# Altium PCB Consola_ESP32_V2.PcbDoc
Units mil, origin at the board's own origin, x right, y up, seen from the top; angles counter-clockwise.
Board outline 1969.17 x 2600 mil, 4 copper layers (Top Layer, GND, VCC, Bottom Layer), stack 62.638 mil thick; 58 components, 92 nets, 300 pads, 182 vias.
Unrouted connection lines stored in the file: 2.
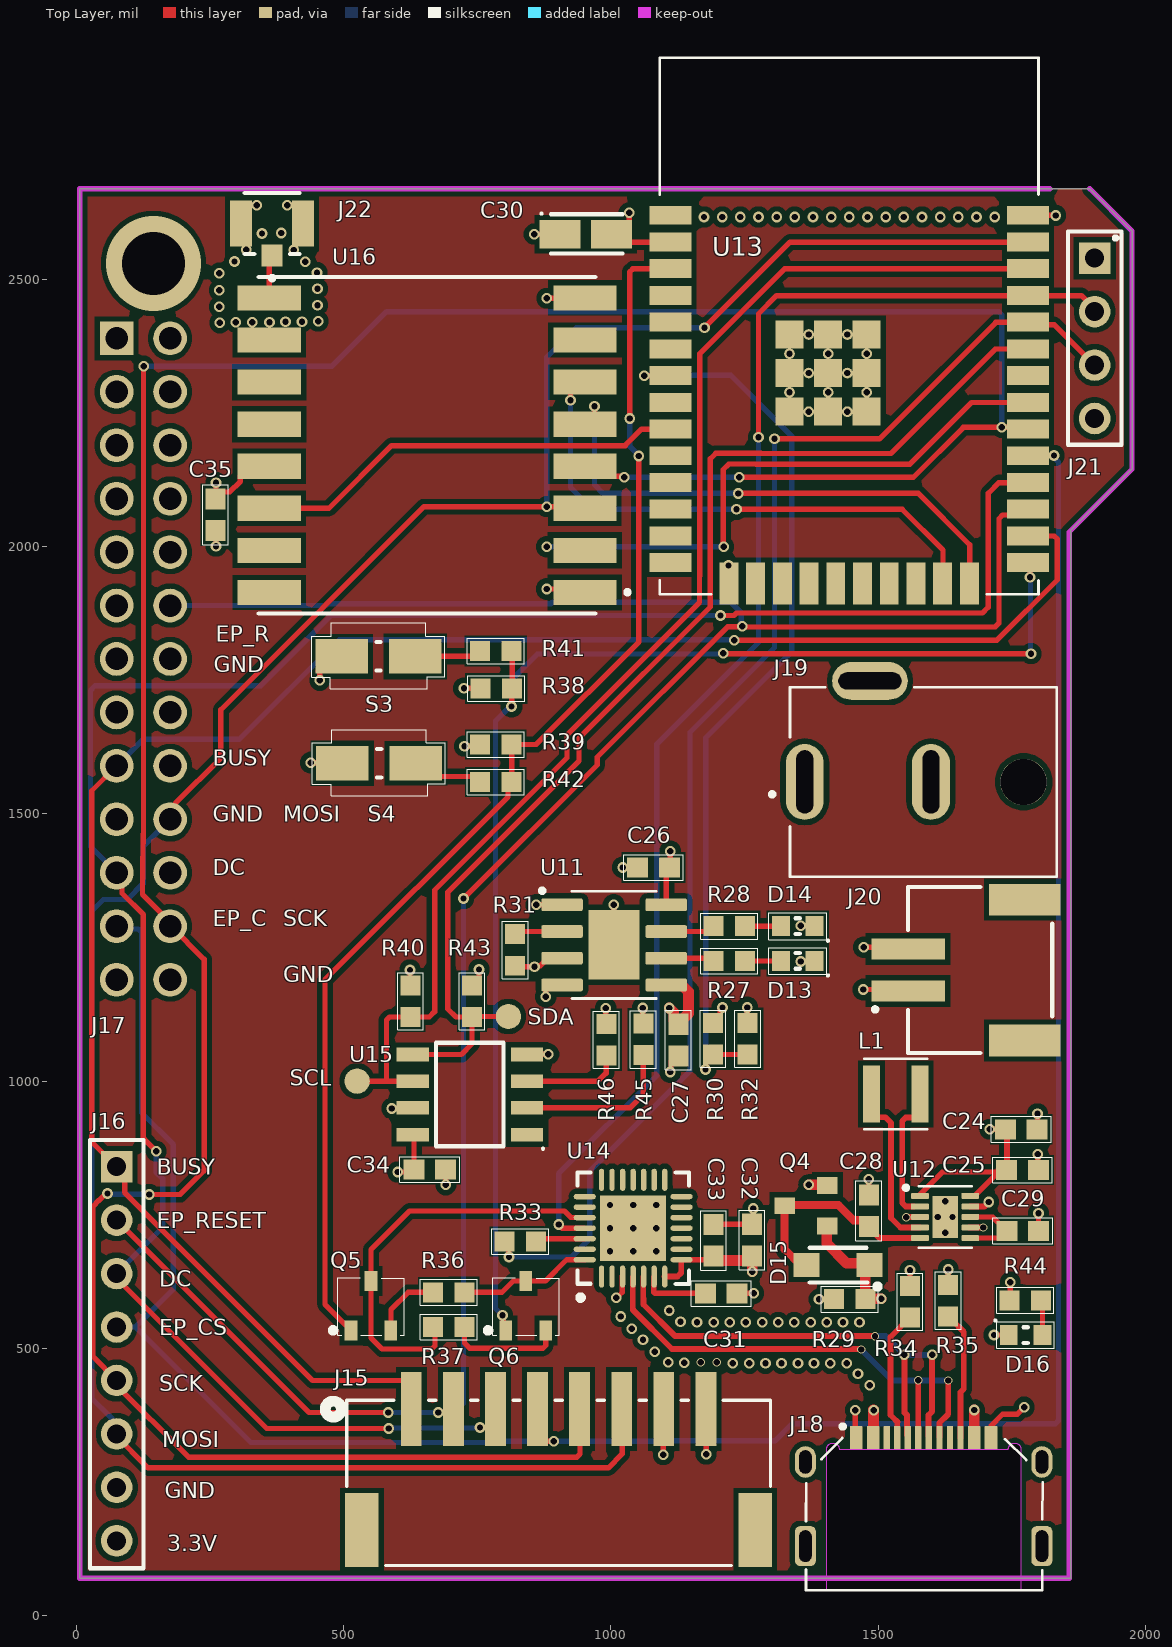
[diagram p0: Top Layer view]
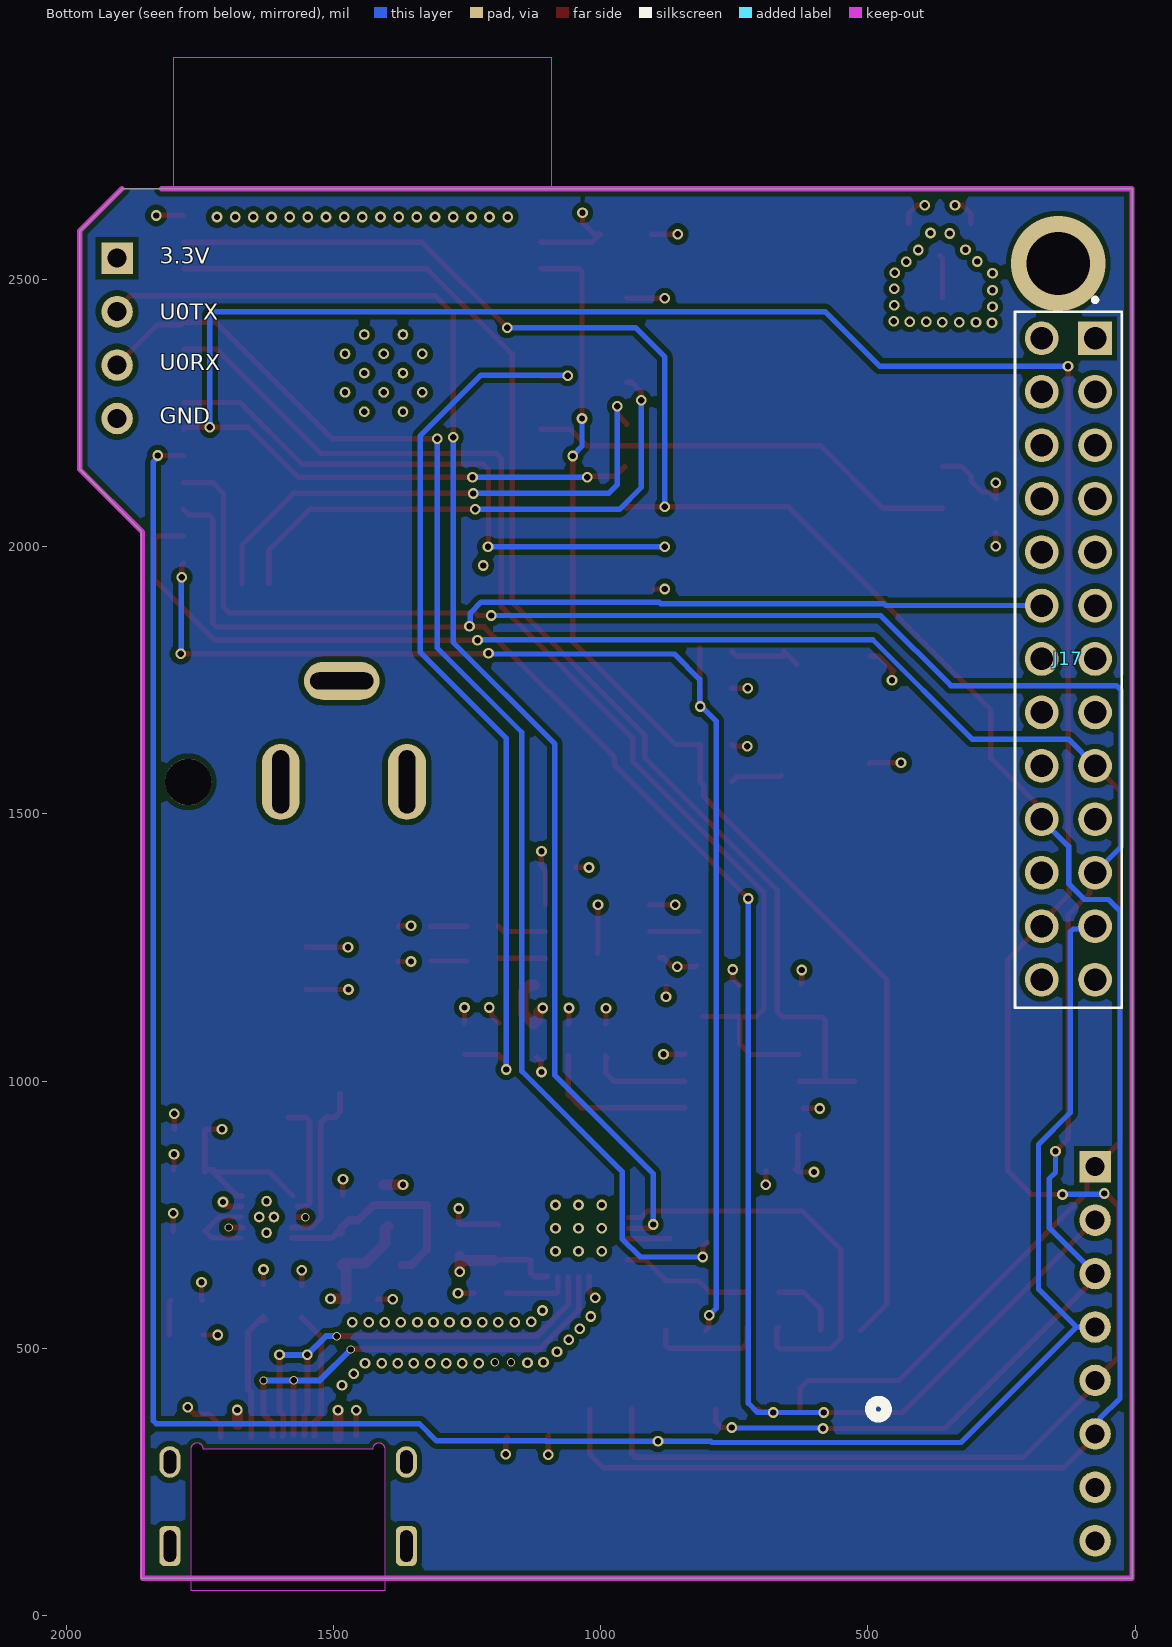
[diagram p1: Bottom Layer view, seen from below]
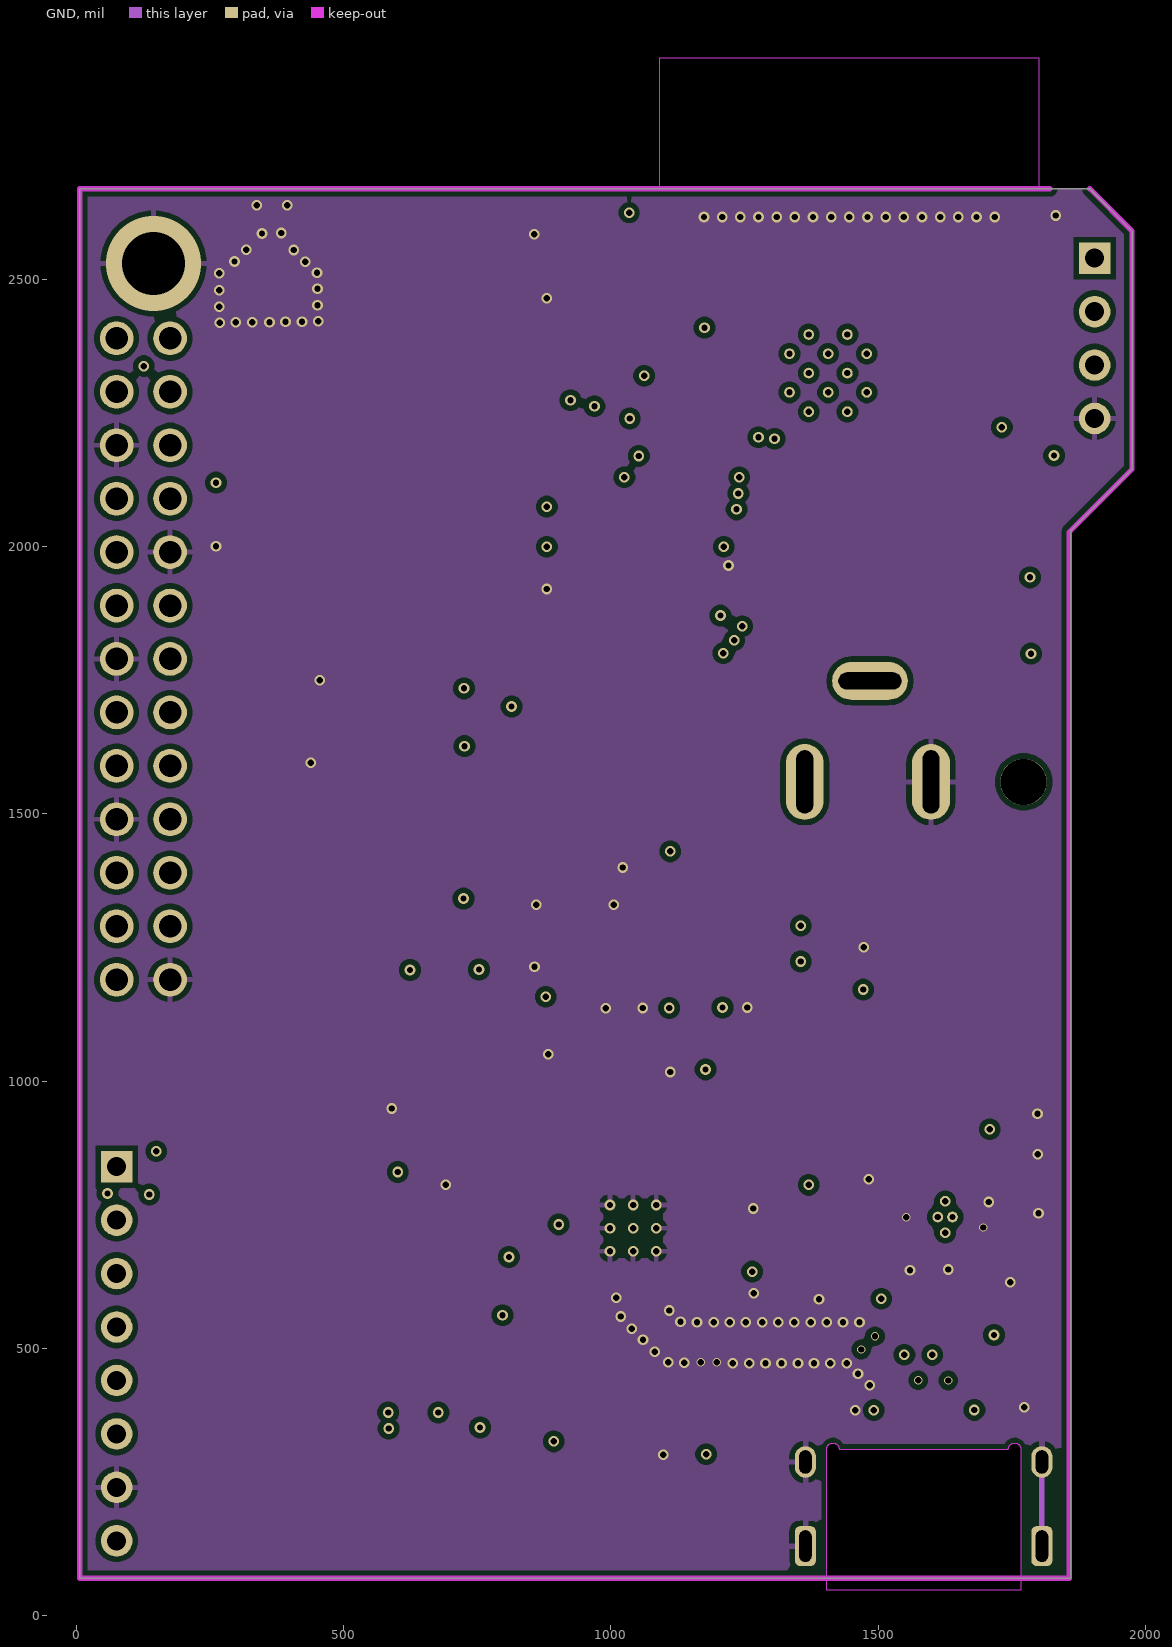
[diagram p2: GND]
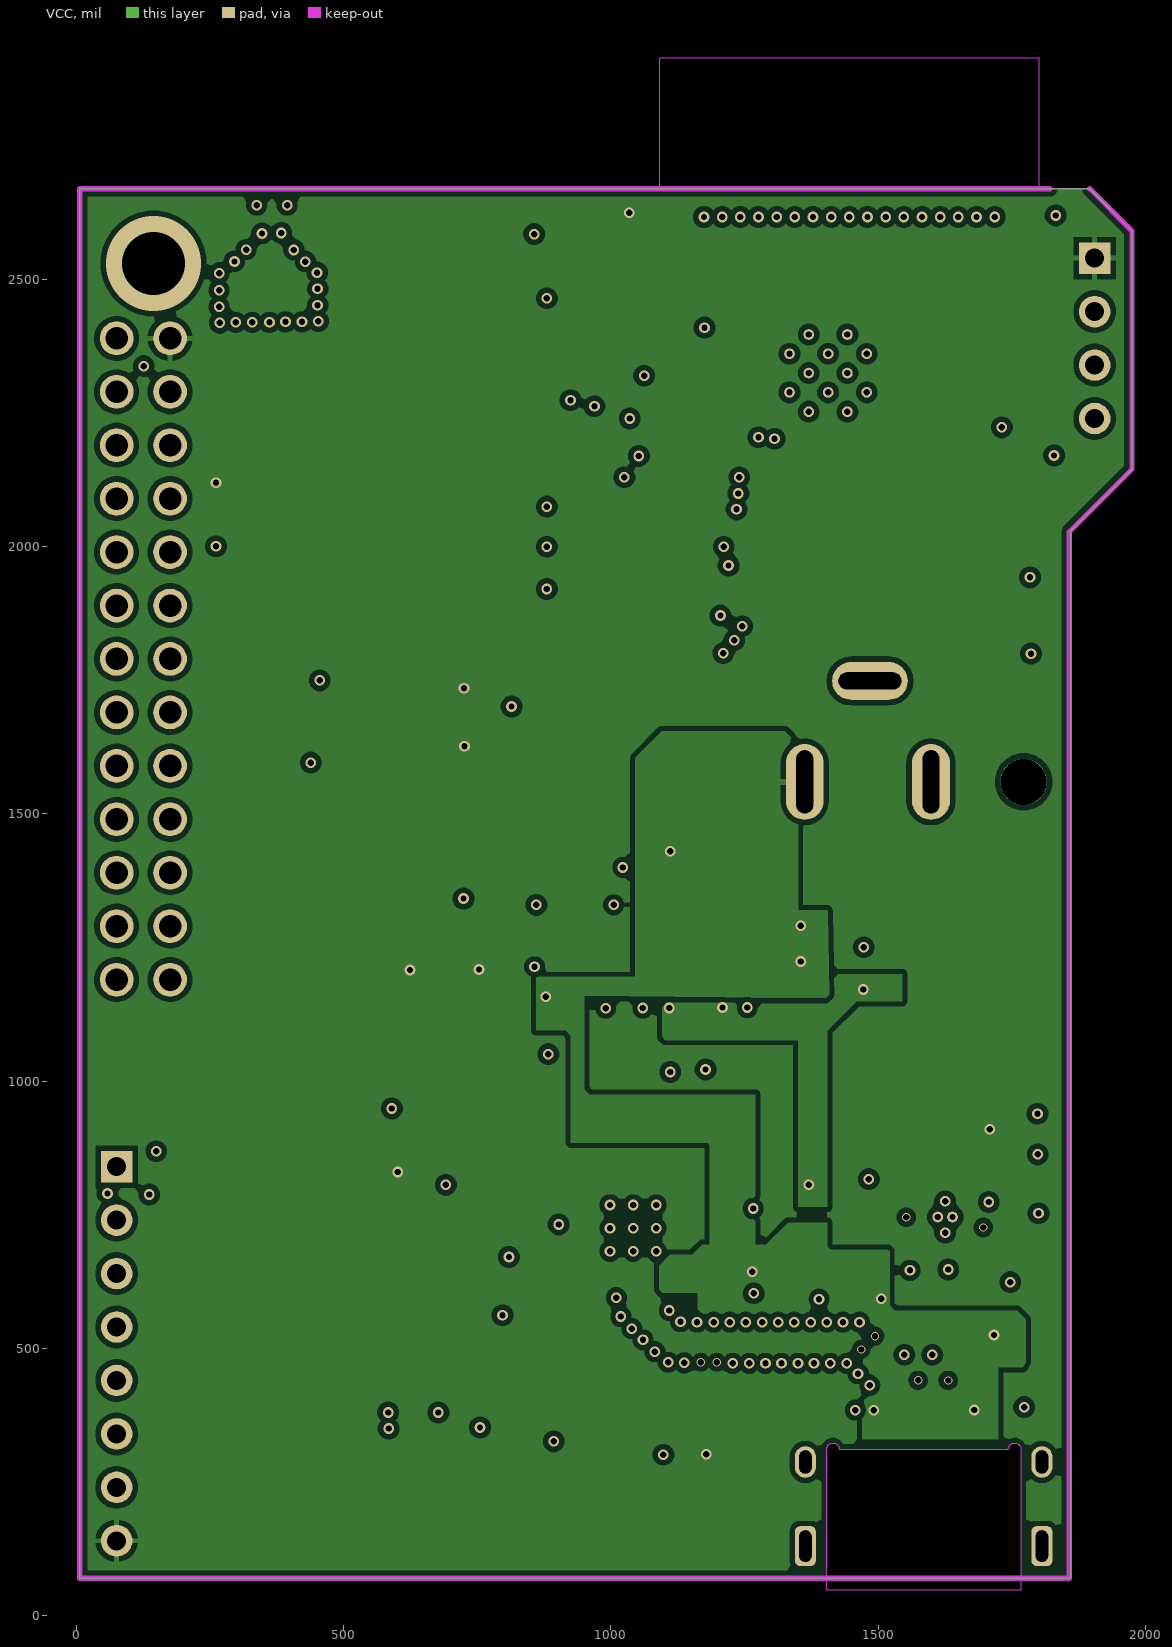
[diagram p3: VCC]

## Layer stack, top to bottom
Top Solder: solder mask 0.4, Solder Resist, Dk 3.5
Top Layer: signal copper 1.378
Dielectric: prepreg 8.2677, FR-4, Dk 4.8
GND: signal copper 0.7087
Dielectric 1: core 41.9291, FR-4, Dk 4.8
VCC: signal copper 0.7087
Dielectric 2: prepreg 8.2677, FR-4, Dk 4.8
Bottom Layer: signal copper 1.378
Bottom Solder: solder mask 0.4, Solder Resist, Dk 3.5

## Board outline
5.83,70 5.83,2670 1895.83,2670 1975,2590.83 1975,2145 1860,2030 1860,70

## Design rules (kind name [scope] priority, off if disabled: settings)
Clearance [All] p1: gap=10 ignorepadtopadclearanceinfootprint=FALSE
DiffPairsRouting [All] p1: maxlimit=10 minlimit=10 mostfreqgap=10 toplayer_minwidth=15 toplayer_maxwidth=15 toplayer_prefwidth=15 midlayer1_minwidth=15 midlayer1_maxwidth=15 midlayer1_prefwidth=15 midlayer2_minwidth=15 midlayer2_maxwidth=15 midlayer2_prefwidth=15 bottomlayer_minwidth=15 bottomlayer_maxwidth=15 bottomlayer_prefwidth=15 maxuncoupledlength=500
PolygonConnect [All] p1: connectstyle=Relief reliefconductorwidth=10 reliefentries=4 polygonreliefangle="90 Angle" airgapwidth=10
RoutingVias [All] p1: holewidth=28 width=50 viastyle="Through Hole" minholewidth=28 minwidth=50 maxholewidth=28 maxwidth=50
SolderMaskExpansion [All] p1: expansion=4 istentingtop=FALSE
SupplyNets "Schematic Supply Nets_8" [InNet('VBUSS')] p1: voltage=0.000
SupplyNets "Schematic Supply Nets_7" [InNet('VIN')] p2: voltage=0.000
SupplyNets "Schematic Supply Nets_6" [InNet('GND')] p3: voltage=0.000
SupplyNets "Schematic Supply Nets_5" [InNet('VDD3V')] p4: voltage=0.000
SupplyNets "Schematic Supply Nets_4" [InNet('VDD5V')] p5: voltage=0.000
SupplyNets "Schematic Supply Nets_3" [InNet('VBATT')] p6: voltage=0.000
SupplyNets "Schematic Supply Nets_2" [InNet('VBUS')] p7: voltage=0.000
SupplyNets "Schematic Supply Nets_1" [InNet('+3V3')] p8: voltage=0.000
SupplyNets "Schematic Supply Nets" [InNet('VLVL')] p9: voltage=0.000
Width [All] p1: maxlimit=20 minlimit=10 preferedwidth=10 minimp=50.000000 maximp=50.000000 favimp=50.000000
29 further rules are at their usual default settings.

## Classes and differential pairs
differential pair D: +D_P -D_N

## Components (designator, comment, footprint, x,y, rotation, side; value= is the part's Value field where it differs from the comment)
C24 "10uF" CAPCP1608_0603 1767.76,910 r180 top
C25 "10uF" CAPCP1608_0603 1770,834 r180 top
C26 "10uF" CAPCP1608_0603 1079.53,1400 r0 top
C27 "10uF" CAPCP1608_0603 1125.87,1077 r90 top
C28 "10uF" CAPCP1608_0603 1482.45,757.65 r270 top
C29 "0.1uF" CAPCP1608_0603 1770.47,720 r180 top
C30 "100nF" CAPC_1206 952.6,2585 r0 top
C31 "1uF" CAPCP1608_0603 1206.47,603 r0 top
C32 "10uF" CAPCP1608_0603 1264.04,702.75 r270 top
C33 "0.1uF" CAPCP1608_0603 1192,702 r270 top
C34 "0.1uF" CAPCP1608_0603 660.83,835 r0 top
C35 "10uF" CAPCP1608_0603 260,2060 r90 top
D13 "GEEN" DIODO_0603 1349.33,1225 r180 top
D14 "ORANGE" DIODO_0603 1349.33,1290 r180 top
D15 "MBR120" SODFL3616X98N 1425,656 r180 top
D16 "LED-ON" DIODO_0603 1775.83,525 r0 top
J15 "Conector e-paper Jst ph2.0" CONN_S8B-PH-SM4-TB_JST 901.89,248.37 r180 top
J16 "Connector_06_m" HDR1X8 75,840 r270 top
J17 "M20-9762046" HARWIN_M20-9762046 125,1440 r270 bottom
J18 "UJ20-C-H-G-MSMT-1-P16-TR" uJ20-C-H-G-MSMT-1-P16-TR 1585,130 r0 top
J19 "PJ-058AH" CUI_PJ-058AH 1362.55,1560 r180 top
J20 "1769" 1769_Conector_Bateria 1556,1208 r90 top
J21 "Connector_04" HDR1X4 1906,2490 r270 top
J22 "Antena" SAMTEC_RSP-122811-01 365.83,2605 r0 top
L1 "ASPI-0315FS" IND_ASPI-0315FS-1R0N-T2 1533,976 r180 top
Q4 "SI2301" SOT-23 1365,767 r180 top
Q5 "S8050" SOT23_8050_JY3 550.83,580 r90 top
Q6 "S8050" SOT23_8050_JY3 840.83,580 r90 top
R27 "1K" RESC1608_0603 1220.83,1225 r180 top
R28 "1K" RESC1608_0603 1220.83,1290 r180 top
R29 "10K" RESC1608_0603 1447,592 r0 top
R30 "100K" RESC1608_0603 1190.83,1080 r90 top
R31 "2K" RESC1608_0603 820.83,1245 r270 top
R32 "100K" RESC1608_0603 1255.83,1080 r90 top
R33 "470R" RESC1608_0603 829.94,700 r180 top
R34 "5.1K" RESC1608_0603 1559.62,587.08 r270 top
R35 "5.1K" RESC1608_0603 1631,589 r270 top
R36 "12K" RESC1608_0603 696.83,605 r0 top
R37 "12K" RESC1608_0603 695.77,540 r180 top
R38 "12K" RESC1608_0603 785,1735 r180 top
R39 "12K" RESC1608_0603 784,1630 r180 top
R40 "4.7" RESC1608_0603 625,1150.06 r90 top
R41 "12K" RESC1608_0603 785,1805 r0 top
R42 "12K" RESC1608_0603 785.06,1560 r0 top
R43 "4.7" RESC1608_0603 740,1149 r270 top
R44 "1K" RESC1608_0603 1775.83,590 r0 top
R45 "10K" RESC1608_0603 1060.49,1077.59 r270 top
R46 "10K" RESC1608_0603 991.23,1077 r270 top
S3 "Button" Button_3_4_2 565,1795 r180 top
S4 "Button" Button_3_4_2 566.1,1595 r180 top
SCL "Test_P" Test_point 525,1000 r90 top (schematic designator TP9)
SDA "Test_P" Test_point 808,1121 r90 top (schematic designator TP6)
U11 "TP4056" SOP127P600X175-9N 1005.83,1255 r0 top
U12 "TPS63031DSKR" SON50P250X250X80-11N 1625.3,745.9 r0 top
U13 "ESP32-WROOM-32" ESP32 639.61,2297.19 r0 top
U14 "CP2102N" QFN_CP2102 1041.45,724.94 r90 top
U15 "AT24CM01-SSHD-T" SOIC-8N 735.83,975 r180 top
U16 "RFM69HCW" COM-13909 655.83,2190 r180 top

## Footprints (in the part's own frame and the unit in brackets; to place one, negate y for a bottom-side part, rotate by r counter-clockwise, add the part's x,y. Pads: shape width x height; smd on the part's side, far side on the other; paste and mask are expansions set on the pad)
1769_Conector_Bateria [mm]
  rect 1x3.5 smd: 1(-1,0) 2(1,0)
  rect 1.5x3.4 smd: 3(-3.35,-5.55) 4(3.35,-5.55)
  silkscreen extent -3.95,-6.85 3.95,1.67, body extent -3.95,-7.57 3.95,1.03, height 4.8
Button_3_4_2 [mm]
  rect 2.5x1.65 smd: 1(-1.75,0) 2(1.75,0)
  silkscreen extent -3.15,-1.6 3.17,1.55, body extent -2.6,-1.52 2.6,1.48, height 1.8
CAPC_1206 [mm] "Molded Capacitor, 2-Leads, Body 3.20x1.60mm, IPC Medium Density"
  rect 1.95x1.35 smd: 1(-1.225,0) 2(1.225,0)
  silkscreen extent -2.15,-0.91 1.75,1.02, body extent -1.55,-0.8 1.65,0.8, height 1.8
CAPCP1608_0603 [mm] "Chip Capacitor, 2-Leads, Body 1.60x0.80mm, IPC Medium Density"
  rect 1x0.95 smd: 1(-0.75,0) 2(0.75,0)
  silkscreen extent -1.42,-0.61 1.42,0.61, body extent -0.8,-0.4 0.8,0.4, height 0.9
COM-13909 [mm]
  rect 3x1.2 smd: 1(-7.5,7) 2(-7.5,5) 3(-7.5,3) 4(-7.5,1) 5(-7.5,-1) 6(-7.5,-3) 7(-7.5,-5) 8(-7.5,-7) 9(7.5,-7) 10(7.5,-5) 11(7.5,-3) 12(7.5,-1) 13(7.5,1) 14(7.5,3) 15(7.5,5) 16(7.5,7)
  silkscreen extent -9.62,-8 8,8, body extent -8.01,-8.02 7.99,7.98, height 1.8
CONN_S8B-PH-SM4-TB_JST [mil]
  rect 39x138 smd paste+0 mask+0: 1(275.59,-138.01) 2(196.85,-138.01) 3(118.11,-138.01) 4(39.37,-138.01) 5(-39.37,-138.01) 6(-118.11,-138.01) 7(-196.85,-138.01) 8(-275.59,-138.01)
  rect 63x138 smd paste-69 mask-69: 9(-368.11,88.37) 10(368.11,88.37)
  silkscreen extent -396,-155 436,155, body extent -392,-177 392,162, height 217
CUI_PJ-058AH [mm]
  oval 1.8x3.6 hole 0.8 slot 3 at 90 deg: 1(0,0) 2(-6,0)
  oval 3.6x1.8 hole 0.8 slot 3 at 0 deg: 3(-3.1,-4.8)
  round 2.2 hole 2.2 unplated: ""(-10.4,0)
  silkscreen extent -11.97,-4.5 1.64,4.5, body extent -14.4,-4.96 0.8,4.49, height 11
DIODO_0603 [mm]
  rect 0.85x0.95 smd: 1(-0.8,0) 2(0.8,0)
  silkscreen extent -1.49,-0.64 1.37,0.74, body extent -0.8,-0.43 0.8,0.43, height 0.8
ESP32 [mm]
  rect 2x0.9 smd: 1(11.972,8.206) 2(11.972,6.936) 3(11.972,5.666) 4(11.972,4.396) 5(11.972,3.126) 6(11.972,1.856) 7(11.972,0.586) 8(11.972,-0.684) 9(11.972,-1.954) 10(11.972,-3.224) 11(11.972,-4.494) 12(11.972,-5.764) 13(11.972,-7.034) 14(11.972,-8.304) 25(28.972,-8.304) 26(28.972,-7.034) 27(28.972,-5.764) 28(28.972,-4.494) 29(28.972,-3.224) 30(28.972,-1.954) 31(28.972,-0.684) 32(28.972,0.586) 33(28.972,1.856) 34(28.972,3.126) 35(28.972,4.396) 36(28.972,5.666) 37(28.972,6.936) 38(28.972,8.206)
  rect 0.9x2 smd: 15(14.757,-9.304) 16(16.027,-9.304) 17(17.297,-9.304) 18(18.567,-9.304) 19(19.837,-9.304) 20(21.107,-9.304) 21(22.377,-9.304) 22(23.647,-9.304) 23(24.917,-9.304) 24(26.187,-9.304)
  rect 1.33x1.33 smd: 39_1(17.637,2.541) 39_2(19.472,2.541) 39_3(21.307,2.541) 39_4(17.637,0.706) 39_5(19.472,0.706) 39_6(21.307,0.706) 39_7(17.637,-1.129) 39_8(19.472,-1.129) 39_9(21.307,-1.129)
  round 0.508 hole 0.3: 39_10(18.555,2.541) 39_11(20.39,2.541) 39_12(17.637,1.624) 39_13(19.472,1.624) 39_14(21.307,1.624) 39_15(18.555,0.706) 39_16(20.39,0.706) 39_17(17.637,-0.211) 39_18(19.472,-0.211) 39_19(21.307,-0.211) 39_20(18.555,-1.129) 39_21(20.39,-1.129)
  Keep-Out Layer region: 29.472,9.396 11.472,9.396 11.472,15.696 29.472,15.696
  silkscreen extent 11.47,-9.8 29.47,15.7, body extent 11.47,-9.8 29.47,15.7, height 3.25
HARWIN_M20-9762046 [mm]
  rect 1.605x1.605 / inner round 1.605 / far side rect 1.605x1.605 hole 1.07: 1(-24.13,1.27)
  round 1.605 hole 1.07: 2(-24.13,-1.27) 3(-21.59,1.27) 4(-21.59,-1.27) 5(-19.05,1.27) 6(-19.05,-1.27) 7(-16.51,1.27) 8(-16.51,-1.27) 9(-13.97,1.27) 10(-13.97,-1.27) 11(-11.43,1.27) 12(-11.43,-1.27) 13(-8.89,1.27) 14(-8.89,-1.27) 15(-6.35,1.27) 16(-6.35,-1.27) 17(-3.81,1.27) 18(-3.81,-1.27) 19(-1.27,1.27) 20(-1.27,-1.27) 21(1.27,1.27) 22(1.27,-1.27) 23(3.81,1.27) 24(3.81,-1.27) 25(6.35,1.27) 26(6.35,-1.27)
  silkscreen extent -26.06,-2.54 7.69,2.54
HDR1X4 [mm]
  rect 1.5x1.5 hole 0.9: 1(-1.27,-0.025)
  round 1.5 hole 0.9: 2(1.27,-0.025) 3(3.81,-0.025) 4(6.35,-0.025)
  silkscreen extent -2.54,-1.3 7.59,1.24
HDR1X8 [mm] "Connector; Header; 6 Position"
  rect 1.5x1.5 hole 0.9: 1(0,0)
  round 1.5 hole 0.9: 2(2.54,0) 3(5.08,0) 4(7.62,0) 5(10.16,0) 6(12.7,0) 7(15.24,0) 8(17.78,0)
  silkscreen extent -1.27,-1.27 19.08,1.27, body extent -1.27,-1.29 19,1.27, height 8.5
IND_ASPI-0315FS-1R0N-T2 [mm]
  rect 0.8x2.7 smd: 1(-1.15,0) 2(1.15,0)
  silkscreen extent -1.5,-1.67 1.5,1.67, body extent -1.5,-1.5 1.5,1.5, height 1.5
QFN_CP2102 [mm] "QFN, 28-Leads, Body 5.00x5.00mm, Pitch 0.50mm, Thermal Pad 3.13x3.13mm, IPC Medium Density"
  oval 1.05x0.25 smd: 1(-2.3,1.5) 2(-2.3,1) 3(-2.3,0.5) 4(-2.3,0) 5(-2.3,-0.5) 6(-2.3,-1) 7(-2.3,-1.5) 15(2.3,-1.5) 16(2.3,-1) 17(2.3,-0.5) 18(2.3,0) 19(2.3,0.5) 20(2.3,1) 21(2.3,1.5)
  oval 0.25x1.05 smd: 8(-1.5,-2.3) 9(-1,-2.3) 10(-0.5,-2.3) 11(0,-2.3) 12(0.5,-2.3) 13(1,-2.3) 14(1.5,-2.3) 22(1.5,2.3) 23(1,2.3) 24(0.5,2.3) 25(0,2.3) 26(-0.5,2.3) 27(-1,2.3) 28(-1.5,2.3)
  rect 3.13x3.13 smd: 29(0,0)
  silkscreen extent -3.42,-2.65 2.65,2.65, body extent -2.55,-2.55 2.55,2.55, height 0.8
RESC1608_0603 [mm]
  rect 0.95x0.95 smd: 1(-0.763,0) 2(0.737,0)
  silkscreen extent -1.37,-0.61 1.35,0.61, body extent -0.8,-0.4 0.8,0.4, height 0.45
SAMTEC_RSP-122811-01 [mm]
  rect 1x1.05 smd: 1(0,-1.525)
  rect 1.05x2.2 smd: G1(-1.475,0) G2(1.475,0)
  silkscreen extent -1.3,-2.7 1.3,1.45, body extent -1.5,-1.51 1.5,1.49, height 1.35
SODFL3616X98N [mm]
  rect 1.24x1.12 smd: 1(-1.5,0) 2(1.5,0)
  silkscreen extent -1.99,-0.82 1.35,1.14, body extent -1.8,-0.83 1.8,0.82, height 0.98
SOIC-8N [mm]
  rect 1.525x0.65 smd: 1(-2.712,1.905) 2(-2.712,0.635) 3(-2.712,-0.635) 4(-2.712,-1.905) 5(2.712,-1.905) 6(2.712,-0.635) 7(2.712,0.635) 8(2.712,1.905)
  silkscreen extent -3.48,-2.46 1.6,2.58, body extent -3,-2.46 3,2.44, height 1.75
SON50P250X250X80-11N [mm]
  rrect25% 0.84x0.27 smd: 1(-1.195,1) 2(-1.195,0.5) 3(-1.195,0) 4(-1.195,-0.5) 5(-1.195,-1) 6(1.195,-1) 7(1.195,-0.5) 8(1.195,0) 9(1.195,0.5) 10(1.195,1)
  rect 1.2x2 smd paste-2: 11(0,0)
  round 0.508 hole 0.3 mask+0: 12(0.35,0) 13(-0.35,0) 14(0,0.75) 15(0,-0.75)
  silkscreen extent -1.97,-1.46 1.25,1.49
SOP127P600X175-9N [mm]
  rrect25% 1.97x0.6 smd: 1(-2.475,1.905) 2(-2.475,0.635) 3(-2.475,-0.635) 4(-2.475,-1.905) 5(2.475,-1.905) 6(2.475,-0.635) 7(2.475,0.635) 8(2.475,1.905)
  rect 2.413x3.302 smd paste-3: 9(0,0)
  silkscreen extent -3.52,-2.55 2,2.68, body extent -3,-2.45 3,2.45, height 1.75
SOT23_8050_JY3 [mm] "SOT23, 3-Leads, Body 2.90x2.40mm, Pitch 0.95mm, IPC Medium Density"
  rect 0.95x0.6 smd: 1(-1.175,0.95) 2(-1.175,-0.95) 3(1.175,0)
  silkscreen extent -1.4,-1.57 1.32,1.92, body extent -1.24,-1.5 1.26,1.5, height 1
SOT-23 [mil]
  rect 38.27x31.57 smd: 1(-40,38) 2(-40,-38) 3(40,0)
  body extent -47,-57 47,57, height 44
Test_point [mm]
  round 1.2 smd: 1(0,0)
uJ20-C-H-G-MSMT-1-P16-TR [mm]
  rect 0.6x1.1 smd: A1_B12(-3.2,5.15) A4_B9(-2.4,5.15) A12_B1(3.2,5.15) B4_A9(2.4,5.15)
  rect 0.3x1.1 smd: A5(-1.25,5.15) A6(-0.25,5.15) A7(0.25,5.15) A8(1.25,5.15) B5(1.75,5.15) B6(0.75,5.15) B7(-0.75,5.15) B8(-1.75,5.15)
  oval 1x1.5 hole 0.6 slot 1.1 at 90 deg: SH1(-5.62,4) SH3(5.62,4)
  rrect50% 1x1.9 hole 0.6 slot 1.5 at 90 deg: SH2(-5.62,0) SH4(5.62,0)
  Keep-Out Layer board cut-out: 4.628,-2.1 -4.612,-2.1 -4.612,4.6 -4.612,4.616 -4.61,4.631 -4.608,4.647 -4.605,4.662 -4.602,4.678 -4.597,4.693 -4.592,4.708 -4.586,4.722 -4.579,4.736 -4.572,4.75 -4.564,4.763 -4.555,4.776 -4.545,4.789 -4.535,4.801 -4.524,4.812 -4.513,4.823 -4.501,4.833 -4.488,4.843 -4.475,4.852 -4.462,4.86 -4.448,4.867 -4.434,4.874 -4.42,4.88 -4.405,4.885 -4.39,4.89 -4.374,4.893 -4.359,4.896 -4.343,4.898 -4.328,4.9 -4.312,4.9 -4.296,4.9 -4.281,4.898 -4.265,4.896 -4.25,4.893 -4.234,4.89 -4.219,4.885 -4.204,4.88 -4.19,4.874 -4.176,4.867 -4.162,4.86 -4.149,4.852 -4.136,4.843 -4.123,4.833 -4.111,4.823 -4.1,4.812 -4.089,4.801 -4.079,4.789 -4.069,4.776 -4.06,4.763 -4.052,4.75 -4.045,4.736 -4.038,4.722 -4.032,4.708 -4.027,4.693 -4.022,4.678 -4.019,4.662 -4.016,4.647 -4.014,4.631 -4.012,4.616 -4.012,4.6 4.028,4.6 4.028,4.616 4.03,4.631 4.032,4.647 4.035,4.662 4.038,4.678 4.043,4.693 4.048,4.708 4.054,4.722 4.061,4.736 4.068,4.75 4.076,4.763 4.085,4.776 4.095,4.789 4.105,4.801 4.116,4.812 4.127,4.823 4.139,4.833 4.152,4.843 4.165,4.852 4.178,4.86 4.192,4.867 4.206,4.874 4.22,4.88 4.235,4.885 4.25,4.89 4.266,4.893 4.281,4.896 4.297,4.898 4.312,4.9 4.328,4.9 4.344,4.9 4.359,4.898 4.375,4.896 4.39,4.893 4.406,4.89 4.421,4.885 4.436,4.88 4.45,4.874 4.464,4.867 4.478,4.86 4.491,4.852 4.504,4.843 4.517,4.833 4.529,4.823 4.54,4.812 4.551,4.801 4.561,4.789 4.571,4.776 4.58,4.763 4.588,4.75 4.595,4.736 4.602,4.722 4.608,4.708 4.613,4.693 4.618,4.678 4.621,4.662 4.624,4.647 4.626,4.631 4.628,4.616 4.628,4.6
  silkscreen extent -5.59,-2.1 5.66,5.79, body extent -5.77,-2.09 5.77,5.11, height 2.59

## Part data
C24 C25 C26 C27 C28 C32 C35: library part C0603X100J1GACAUTO, "Capacitor_10uF_0603"
C29 C33 C34: library part 06035C104K4T4A, "Capacitor_0.1uF_0603"
C30: library part TAJD107K016RNJ, "Capacitor_100uF_1206"
C31: library part C0603X105J4RACTU, "Capacitor_1uF_0603"
D13 D16: library part SMLD12EN1WT86, "LED_VERDE_0603"
D14: library part SML-D12D1WT86, "LED_NARANJA_0603"
D15: library part MBR120ESFT3G, "Diodo_Zenner_Sod-123FL-2"
J15: library part S8B-PH-SM4-TBLFSN, "Connector e-paper", Mfr_Name=JST, RefDes=RefDes, Type=Type
J16: library part Connector_08_m
J17: "2X20 - 2.54mm", Package=None, Availability=Unavailable, MP=M20-9762046, Price=None
J18: "Conector usb c", Package=None, Availability=Unavailable, MP=UJ20-C-H-G-MSMT-1-P16-TR, Price=None
J19: "2.0 x 5.7 mm, 5.0 A, Horizontal, Through Hole, Locking Type, Dc Power Jack Connector", Package=None, Check_prices=https://www.snapeda.com/parts/PJ-058AH/CUI+Devices/view-part/?ref=eda, CUI_purchase_URL=https://www.cuidevices.com/product/interconnect/connectors/dc-power-connectors/jacks/pj-058ah?utm_source=snapeda.com&utm_medium=referral&utm_campaign=snapedaBOM, MF="CUI Devices", MP=PJ-058AH, SnapEDA_Link=https://www.snapeda.com/parts/PJ-058AH/CUI+Devices/view-part/?ref=snap
J20: "Adafruit Accessories JST-PH 2-pin SMT Right Angle Connect", Manufacturer_Name=Adafruit, Mouser Part Number=485-1769, Datasheet Link=https://cdn-shop.adafruit.com/datasheets/17311.pdf, Geometry.Height=5.5mm, Manufacturer_Part_Number=1769, Mouser Price/Stock=https://www.mouser.co.uk/ProductDetail/Adafruit/1769?qs=GURawfaeGuBbgoGtf2XstA%3D%3D
J21: library part Connector_04_uart
J22: library part RSP-122811-01, "U.FL (UMCC), IPEX MHF1 Connector Receptacle, Male Pin 50Ohm Surface Mount Solder", Package=None, Availability=Unavailable, MP=RSP-122811-01, Price=None
L1: library part ASPI-0315FS-1R0N-T2, Package=None, Availability=Unavailable, MP=ASPI-0315FS-1R0N-T2, Price=None
Q4: library part SI2301CDS-T1-GE3, "P-Channel 20 V 3.1A (Tc) 860mW (Ta), 1.6W (Tc) Surface Mount SOT-23", Package="SOT-23-3 Vishay Siliconix", Availability="In Stock", Check_prices=https://www.snapeda.com/parts/SI2301CDS-T1-GE3/Vishay+Siliconix/view-part/?ref=eda, MF=Vishay, MP=SI2301CDS-T1-GE3, Price=None, Purchase-URL=https://pricing.snapeda.com/search?q=SI2301CDS-T1-GE3&ref=eda, SnapEDA_Link=https://www.snapeda.com/parts/SI2301CDS-T1-GE3/Vishay+Siliconix/view-part/?ref=snap
Q5 Q6: library part ASS8050-L-HF, "Transistor_Sot_23_j3y"
R27 R28 R44: library part RCA06031K00JNEA, "Resistencia_1K_0603"
R29 R45 R46: library part RCA060310K0JNEA, "Resistencia_10K_0603"
R30 R32: library part RCA0603100KFKEAHP, "Resistencia_100K_0603"
R31: library part RCA06032K00FKEA, "Resistencia_2K_0603"
R33: library part RCA0603470RFKEA, "Resistencia_470R_0603"
R34 R35: library part RCA06035K10JNEA, "Resistencia_5.1K_0603"
R36 R37 R38 R39: library part RCA060312K0JNEA, "Resistencia_12KR_0603"
R40 R43: library part RCA06034K70FKEA, "Resistencia_4.7K_0603"
R41 R42: library part 12KR_0603_25w
S3 S4: "Tactile Switch"
SCL SDA: library part Test_point
U11: "Linear Li-Ion charger IC, 4.2V CC/CV, up to 1A, auto-recharge, thermal regulation.", Package=Package, Availability="Not in stock", Check_prices=https://www.snapeda.com/parts/TP4056/NanJing+Top+Power+ASIC+Corp./view-part/?ref=eda, MF="NanJing Top Power ASIC Corp.", MP=TP4056, Price=None, SnapEDA_Link=https://www.snapeda.com/parts/TP4056/NanJing+Top+Power+ASIC+Corp./view-part/?ref=snap
U12: "High Efficient Single Inductor Buck-Boost Converter with 1-A Switches", Package=None, Availability=Unavailable, MP=TPS63031DSKR, Price=None
U13: "ESP-32_48Pines"
U14: library part CP2102N-A02-GQFN28R, "Conversor USB a UART de Silicon Labs CP2102"
U15: "EEPROM SERIAL EEPROM, 1M 2-WIR-8 SOIC", Manufacturer_Name=Microchip, Mouser Part Number=556-AT24CM01-SSHD-T, Datasheet Link=https://4donline.ihs.com/images/VipMasterIC/IC/ATML/ATML-S-A0000726505/ATML-S-A0000726505-1.pdf?hkey=EF798316E3902B6ED9A73243A3159BB0, Geometry.Height=1.75mm, Manufacturer_Part_Number=AT24CM01-SSHD-T, Mouser Price/Stock=https://www.mouser.co.uk/ProductDetail/Microchip-Technology/AT24CM01-SSHD-T?qs=s44pgLhgXQig9Z6HBeFbBg%3D%3D
U16: library part COM-13909, "Rfm69hcw Wireless Transceiver 91", Package=None, Availability=Unavailable, MP=COM-13909, Price=None

## Via types
v1: diameter 20, hole 11.81, Top Layer to Bottom Layer, tented both sides, 164 vias
v2: diameter 20, hole 11.81, Top Layer to Bottom Layer, 9 vias
v3: diameter 15.75, hole 11.81, Top Layer to Bottom Layer, tented both sides, 8 vias
v4: diameter 177.17, hole 118.11, Top Layer to Bottom Layer, 1 vias

## Nets (pads, with @x,y where several pads share a name; then routed paths per layer and width w, separated by ;. In a path a pad name is that pad's centre, name@x,y a point inside that pad or via, vN(x,y) a via of type N, cw(c..) or ccw(c..) an arc to the next point about the centre after c; other vN are vias at no path point)
+3V3: C24.2 C25.2 C30.2 C34.1 C35.2 J15.8 J16.8 J17.2 J21.1 R38.2 R39.2 R40.2 R43.1 U12.1 U12.10 U13.2 U15.8 U16.13 | length 965.1
  Top Layer w10: C35.2 273.04,2102.56 286.56,2102.56 306.5,2122.5 306.5,2132.01 325.12,2150.63 U16.13 ; C35.2@261,2090 v1(261,2120) ; v1(601,830) 631,830 C34.1@636,835 ; v1(624,1208) 624,1183 R40.2@625,1182 ; U15.8 631.3,897.76 C34.1 ; v1(725,1735) R38.2 ; v1(725.97,1626.89) 751.89,1626.89 R39.2 ; R43.1 753,1192.06 v1(753,1209) ; v1(1034,2625) 1034,2606.57 1012.43,2585 C30.2 1015.83,2570 U13.2@1111.54,2570 ; J15.8@1175,334 1178,331 v1(1178,302) ; U12.1@1576.31,786.18 1620.13,830 C25.2@1725,830 ; v1(1708.7,910) C24.2@1740.47,910 ; C25.2@1724.53,834 C25.2
  Top Layer w11: U12.10 1680.28,785.28 C25.2@1725,830 ; C24.2 1740.94,907.28 C25.2@1740.94,830
AREF: 
BUSY: J15.1 J16.1 J17.17 U13.26 | length 3609
  Top Layer w10: J17.17 28.41,1543.41 28.41,886.59 J16.1 90,825 90,791.73 441.73,440 612.63,440 627.13,425.5 J15.1@627.13,386.38 ; v1(1230.7,1825) 1231.07,1825.37 1722.37,1825.37 1835.2,1938.2 1835.2,2014.14 1829.34,2020 U13.26@1780.83,2020
  Bottom Layer w10: J17.17 125,1640 305,1640 491,1826 1229.7,1826 v1(1230.7,1825)
"D3 IRQ": 
"D4 RST": 
"D8 CS": 
D13: 
D_N: J18.A7 J18.B7 U14.5 | length 943.5
  Top Layer w10: 1060.67,593.51 U14.5@1060.67,634.45
  Top Layer w11: 1060.83,582.17 1060.83,593.35 ; 1061,582 1120,523 v3(1494,523) ; 1549,380 v1@1549,489 ; 1549.5,379.5 1554.15,374.85 1554.15,337.85 J18.B7@1555,337 ; J18.A7@1595,336 1594.09,336.91 1594.09,375.09 1601,382 v1@1601,489
  Bottom Layer w11: v3(1494,523) 1514.08,523 v1(1548.95,488.13) 1549.08,488 1602,488 v1@1603,489
  other v1: 1601.13,487.87
D_P: J18.A6 J18.B6 U14.4 | length 922.7
  Top Layer w10: 1041.01,573.97 U14.4@1041.01,634.42
  Top Layer w11: 1041.01,572.29 1041.01,573.97 ; 1041.5,571.5 1114,499 v3@1469,499 ; v3@1574.38,442 1574.39,440.28 1575,439.67 J18.A6@1575,338 ; J18.B6@1614.42,335.58 1614.42,360.42 1631,377 v3(1631,440)
  Bottom Layer w11: v3(1468,498) 1525.72,440.28 v3(1574.67,440.28) ; v3@1574.16,440.14 1630.86,440.14 v3(1631,440)
DC: J15.3 J16.3 J17.21 U13.28 | length 4091
  Top Layer w10: J16.3@65.83,640 355.83,350 v1(584,350) ; J17.21 85,1380 85,1351.72 125,1311.72 125,893 ; 126,893 126,892 v1(149,869) ; v1(755,352) 774.28,352 784.61,362.33 J15.3@784.61,386.38 ; v1(1204.8,1871.26) 1230.2,1871.26 1235.07,1876.14 1694.99,1876.14 1705.89,1887.04 1705.89,2100.03 1725.86,2120 U13.28@1780.83,2120
  Bottom Layer w10: J16.3 161,726 161,817.42 149,829.42 v1(149,869) ; J17.21 28.87,1436.13 25.94,1439.06 25.94,1730.94 35,1740 345,1740 476.26,1871.26 v1(1204.8,1871.26) ; v1(584,350) 585,351 754,351 v1(755,352)
DTR: Q6.3 R36.2 U14.28 | length 249.7
  Top Layer w10: R36.2 795.83,605 817.09,626.26 Q6.3 877.09,626.26 916.77,665.94 U14.28@950.28,665.94
EN: Q5.1 R39.1 R42.2 U13.3 | length 2356.7
  Top Layer w10: Q5.1 465,582.17 465,1190 807.16,1532.16 807.16,1553.1 R42.2 814.06,1625 R39.1 860,1630 1052.17,1822.17 v1(1052.17,2170) ; v1(1035,2240) 1035,2514.14 1040.86,2520 U13.3@1111.54,2520
  Bottom Layer w10: v1(1035,2240) 1035,2188.19 1052.17,2171.02 v1(1052.17,2170)
EP_CS: J15.4 J16.4 J17.23 U13.29 | length 4595.1
  Top Layer w10: J15.4@869,326 v1(893,326) ; U13.29@1780.83,2170 1781.69,2170.87 v1(1829.08,2170.87)
  Bottom Layer w10: J16.4 110,540 ; J17.23 80.16,1284.84 115.74,1284.84 121.59,1278.98 121.59,940.92 181,881.51 181,611 110,540 ; v1(1829.08,2170.87) 1829.08,2169.31 1831.96,2166.44 1831.96,2163.93 1837.5,2158.38 1837.5,364.86 1831.64,359 1339,359 1307,327 1102.81,327 1101.81,326 793.68,326 791.69,324.02 325.98,324.02 110,540
EP_RESET: J15.2 J16.2 J17.12 U13.27 | length 4368.3
  Top Layer w10: J16.2 435.02,379.98 v1(582.97,379.98) ; v1(677,380) 699.49,380 J15.2@705.87,386.38 ; v1(724.04,1341.69) 974.25,1591.9 974.25,1606.25 1218.08,1850.08 1244.38,1850.08 1244.86,1850.57 v1(1245.43,1851.14) ; v1@1245.43,1850 1718.71,1850 1725.89,1857.18 1725.89,2052.41 1732.86,2059.38 1770.2,2059.38 U13.27@1780.83,2070
  Bottom Layer w10: J17.12 466.72,1890 469.85,1893.13 887.5,1893.13 890.63,1896.26 1223.74,1896.26 1243.86,1876.14 1243.86,1852.7 v1(1245.43,1851.14) ; v1(582.97,379.98) 676.88,379.99 676.93,379.93 677.42,380.42 707,380.42 724.04,397.46 v1(724.04,1341.69)
GND: C24.1 C25.1 C26.1 C27.1 C28.1 C29.1 C30.1 C31.2 C32.1 C33.1 C34.2 C35.1 J15.7 J16.7 J17.5 J17.10 J17.13 J17.19 J17.26 J18.A1_B12 J18.A12_B1 J18.SH1 J18.SH2 J18.SH3 J18.SH4 J19.2 J20.2 J21.4 J22.G1 J22.G2 R29.1 R31.2 R32.2 R34.1 R35.1 R44.1 R45.1 R46.1 S3.2 S4.2 U11.1 U11.3 U11.9 U12.3 U12.7 U12.9 U13.1 U13.15 U13.38 U14.3 U14.29 U15.4 U15.7 U16.1 U16.8 U16.10 | length 1840.7
  Top Layer w10: v1(261,2001) 261,2025 C35.1@262,2026 ; J22.G1 307.76,2623.33 323.43,2639 v1(337,2639) ; v1(394,2639) 408.23,2639 423.9,2623.33 J22.G2 ; v1(438.15,1596) 496.2,1596 S4.2 ; v1(455,1750) 455,1767.52 451.89,1767.52 479.37,1795 S3.2 ; v1(590,949) 590.5,949.5 620.5,949.5 U15.7@621,949 ; C34.2@690,833 691,832 v1(691,806) ; R31.2 822.83,1214 v1(857,1214) 858.91,1215.91 867.33,1215.91 882.42,1231 U11.3@890,1231 ; U15.4 842.9,1050.3 882.44,1050.3 v1(882.74,1050.6) ; v1(856.14,2585) C30.1 ; v1(860.31,1329.86) 860.38,1329.93 908.32,1329.93 U11.1 ; v1(880,1921) 899,1921 U16.1@900,1920 ; v1(880,2465) 950.51,2465 U16.8 ; v1(990.12,1136.61) 990.12,1108.16 R46.1 ; v1(1005,1330) 1005,1240 U11.9@1006,1239 ; v1(1010,595) 1011.01,595 1021.01,605 ; v1@1021,1401 v1(1022,1400) C26.1@1047,1400 ; 1021.1,606.16 1021.34,606.4 U14.3@1021.34,634.99 ; v1(1059.49,1136.92) 1059.49,1108.64 R45.1 ; v1(1098,301) J15.7@1098,337 ; v1(1110.93,1017.29) 1112.17,1018.53 1112.17,1037.17 C27.1@1120,1045 ; C33.1 1192.75,732.27 C32.1 1265.95,734.19 v1(1265.95,761.68) ; C31.2@1237,603 v1(1267,603) ; v1(1254.87,1137.83) 1254.87,1109.95 R32.2 ; v1(1389.39,592) R29.1 ; J18.A1_B12@1457.26,336.74 v1(1457.26,384.56) ; v1(1472.96,1250.68) 1550.91,1250.68 J20.2@1551.5,1251.26 ; C28.1 v1(1482.45,816.71) ; v1(1559.49,646) 1559.49,617.26 R34.1 ; R35.1 v1(1630.97,647.7) ; J18.A12_B1@1711,334 1711,355 1733,377 1760.71,377 v1@1773.13,389.42 ; R44.1 1747,591.23 v1(1747,624) ; U13.38@1780.83,2620 v1(1832,2620) ; C24.1 1798,910.72 v1(1798,939) ; v1(1798.53,863) 1798.53,835 C25.1 ; C29.1 v1(1800,753)
  Top Layer w11: v3@1553.19,745.69 U12.3@1568.87,745.69 ; U12.7@1670.09,726.22 U12.7 v3@1697.01,726.22 ; U12.9 1698.59,765.59 v1@1708,775
  GND w10: J18.SH4@1806.26,150 J18.SH3 J18.SH3@1806.26,307.32
  other v1: 1773,390 1484.13,430.87 1462.21,452.79 1228,472 1259,472 1289,472 1319,472 1350,472 1380,472 1410,472 1441,472 1137,473 1107,474 1082,494 1060,516 1039,537 1161,549 1192,549 1222,549 1252,549 1283,549 1313,549 1343,549 1374,549 1404,549 1434,549 1465,549 1130,550 1018.42,559.62 1109,571 1706.9,774.01 1220,1965 268,2419 298,2420 329,2420 361,2420 391,2421 422,2421 452,2422 267,2449 451,2452 267,2480 451,2483 267,2512 450,2513 295.51,2533.92 428.08,2533.51 406.16,2555.43 317.43,2555.84 347,2586 383,2587 1174,2617 1208,2617 1242,2617 1276,2617 1310,2617 1344,2617 1378,2617 1412,2617 1446,2617 1480,2617 1514,2617 1548,2617 1582,2617 1616,2617 1650,2617 1684,2617 1718,2617
  other v2: 998.14,681.64 1041.45,681.64 1084.76,681.64 998.14,724.94 1041.45,724.94 1084.76,724.94 998.14,768.25 1041.45,768.25 1084.76,768.25
  other v3: 1168,474 1198,474 1696.35,726.2 1552.54,745.68
  other v4: 144,2530
IO0: Q6.1 R38.1 R41.2 U13.25 | length 2510.5
  Top Layer w10: v1(797,562) 798.1,560.9 798.1,538.9 Q6.1@804,533 ; v1(814,1701) 814,1733.94 R38.1 815.06,1803.94 R41.2 ; R41.2@815,1810 R41.2@815.06,1810.06 ; v1(1210,1801) 1211,1800 v1(1786,1800) ; U13.25@1780.83,1970 1784.05,1966.78 v1(1784.05,1942.67)
  Bottom Layer w10: v1(797,562) 784,575 784,1673.71 811.29,1701 v1(814,1701) 814.88,1701.88 814.88,1751.86 862.3,1799.28 1208.28,1799.28 v1(1210,1801) ; v1(1784.05,1942.67) 1785.02,1941.69 1785.02,1800.98 v1(1786,1800)
IO2: 
IO4: 
IO5: 
IO16: 
IO17: 
IO18: 
IO23: 
IRQ: U13.9 U16.14 | length 812.3
  Top Layer w10: U16.14 471.89,2071.89 589.25,2189.25 1026.42,2189.25 1057.17,2220 U13.9@1111.54,2220
LR_CS: U13.24 U16.5 | length 1009.8
  Top Layer w10: U16.5 969,2247.27 v1(969,2263) ; v1(1238.28,2099.82) 1575.18,2099.82 1671.18,2003.82 U13.24@1671.18,1930.63
  Bottom Layer w10: v1(969,2263) 969,2116.16 985.34,2099.82 v1(1238.28,2099.82)
LR_RESET: U13.23 U16.6 | length 1022
  Top Layer w10: v1(924.15,2274.23) 924.15,2289.49 942.77,2308.11 U16.6 ; v1(1235,2070) 1545,2070 1621.18,1993.82 U13.23@1621.18,1930.63
  Bottom Layer w10: v1(924.15,2274.23) 924.15,2110.85 965,2070 v1(1235,2070)
MISO: U13.31 U16.2 | length 1099.1
  Top Layer w10: v1(1211,2000) 1210,2001 1210,2144.56 1220.44,2155 1271.65,2155 1272.09,2154.57 1559.51,2154.57 1674.94,2270 U13.31@1780.83,2270
  Bottom Layer w10: v1(880,2000) v1(1211,2000)
MOSI: J15.6 J16.6 J17.20 U13.37 U16.3 | length 4691.1
  Top Layer w10: J16.6@65.83,340 70.51,340 133.99,276.52 994.97,276.52 1020.83,302.38 J15.6@1020.83,386.38 ; J17.20 185.18,1500.18 185.18,1520.18 270,1605 270,1695 650,2075 947.99,2075 U16.3 ; v1(1175,2410) 1335,2570 U13.37@1780.83,2570
  Bottom Layer w10: J16.6@65.83,340 J16.6@70.51,340 ; J16.6 65.61,349.39 65.61,369.39 28.41,406.59 28.41,1318.41 50,1340 95,1340 124.51,1369.51 124.51,1439.51 J17.20 ; v1(880,2075) 880,2355 935,2410 v1(1175,2410)
NetC7_1: 
NetC9_1: 
NetC10_1: 
NetC15_2: 
NetC17_2: 
NetC22_1: 
NetC28_2: C28.2 D15.2 Q4.3 U12.5 | length 435.3
  Top Layer w11: C28.2 1486,724.57 1495.65,714.93 1495.65,712.98 1502.09,706.54 U12.5@1578.16,706.54
  Top Layer w15: D15.2@1371.85,656 D15.2 1354.35,656 1325,685.35 Q4.3 1325,768.34 1425.33,768.34 1453.89,739.78 1471.24,739.78 1486,725.02 1486,724.57 C28.2@1486,716.47
NetC29_2: C29.2 U12.6 U12.8 | length 153.7
  Top Layer w10: U12.6 1727.48,706.54 C29.2 1739.96,720 1714.06,745.91 U12.8
NetC31_1: C31.1 U14.6 | length 126.8
  Top Layer w10: U14.6@1080.2,634.45 1080.2,605.38 1082.58,603 C31.1
NetD2_2: 
NetD7_2: 
NetD11_2: 
NetD13_2: D13.2 R27.1 | length 67
  Top Layer w10: R27.1 D13.2
NetD14_2: D14.2 R28.1 | length 67
  Top Layer w10: R28.1 D14.2
NetD16_2: D16.2 R44.2 | length 66
  Top Layer w10: R44.2 1807.32,587.5 D16.2
NetJ1_A5: 
NetJ1_B5: 
NetJ8_1: 
NetJ18_A5: J18.A5 R34.2 | length 242.7
  Top Layer w11: J18.A5@1535.53,336.34 1535.53,361.53 1536,362 1533.49,364.51 1533.15,364.51 1533.15,365.19 1523,375.34 1523,521.45 R34.2
NetJ18_B5: J18.B5 R35.2 | length 252.8
  Top Layer w11: R35.2@1627,553 R35.2@1638,553 ; R35.2 R35.2@1638,553 ; J18.B5 1653.9,417.9 1660,424 1660,531 R35.2@1638,553
NetJ22_1: J22.1 U16.9 | length 81.6
  Top Layer w10: U16.9 360.55,2539.68 J22.1
NetL1_1: L1.1 U12.2 | length 220.2
  Top Layer w11: U12.2@1567.13,765.59 1551.44,765.59 1545,772.03 1545,925.56 1551.44,932 L1.1@1584.25,932
NetL1_2: L1.2 U12.4 | length 317.6
  Top Layer w11: L1.2 1487.72,942.72 1497.97,932.47 1513.53,932.47 1524,922 1524,744.03 1541.81,726.22 U12.4@1578.16,726.22
NetQ1_2: 
NetQ2_2: 
NetQ5_2: Q5.2 R36.1 | length 130.7
  Top Layer w10: Q5.2 588.23,572.4 620.83,605 R36.1
NetQ6_2: Q6.2 R37.1 | length 216.9
  Top Layer w10: R37.1 725.83,510 735.83,500 872.37,500 878.23,505.86 Q6.2
NetR2_1: 
NetR8_2: 
NetR9_2: 
NetR13_1: 
NetR18_1: 
NetR19_1: 
NetR23_2: 
NetR24_2: 
NetR26_2: 
NetR27_2: R27.2 U11.6 | length 87.8
  Top Layer w10: U11.6 1189.09,1230 R27.2@1190.47,1231.37
NetR28_2: R28.2 U11.7 | length 92.7
  Top Layer w10: U11.7 1181.83,1280 R28.2
NetR31_1: R31.1 U11.2 | length 92.6
  Top Layer w10: R31.1@815.83,1279.94 815.88,1280 U11.2
NetR33_1: R33.1 U14.26 | length 79.6
  Top Layer w10: R33.1@870.83,705 871.14,705.31 U14.26@950.28,705.31
NetR41_1: R41.1 S3.1 | length 136.6
  Top Layer w10: S3.1@632.8,1780 S3.1@657.8,1805 ; S3.1@657.8,1795 744.94,1795 R41.1
NetR42_1: R42.1 S4.1 | length 97.6
  Top Layer w10: S4.1@662.49,1572.21 664.7,1570 745,1570 R42.1
NetR45_2: R45.2 U15.2 | length 302
  Top Layer w10: U15.2 1035.83,950 1060.49,974.66 R45.2
NetR46_2: R46.2 U15.3 | length 189.8
  Top Layer w10: U15.3 975.83,1000 990.83,1015 990.83,1042.41 988.23,1045 R46.2
NetR47_2: 
RAIN: 
RESET: 
RTS: Q5.3 R37.2 U14.24 | length 765.9
  Top Layer w10: 610,744 623,757 913,757 925,745 U14.24@947.85,745 ; 610.51,744.68 550.83,685 Q5.3 550.83,519.42 571.39,498.85 664.68,498.85 670.83,505 670.83,535.94 R37.2
SCK: J15.5 J16.5 J17.24 U13.30 U16.4 | length 5887.1
  Top Layer w10: v1(58,790) 55.29,790 42.65,777.36 42.36,777.36 30.47,765.47 30.47,484.53 J16.5 ; J16.5@70.41,435.41 209.31,296.52 936.23,296.52 942.09,302.38 J15.5@942.09,386.38 ; v1(125.62,2338.01) 125.31,2337.7 125.31,1485.64 125.31,1485.45 123.71,1400.18 123.34,1353.39 123.34,1349.21 175.45,1297.1 175.45,1292.95 175.45,1290.45 J17.24 176.65,1290 238.61,1228.03 238.61,832.72 193.9,788 v1(136,788) ; U16.4@955,2150 972.99,2132.01 1020.29,2132.01 1022.29,2130 v1(1025,2130) ; v1(1240,2130) 1565.8,2130 1659.21,2223.41 v1(1731.32,2223.41) 1777.42,2223.41 U13.30@1780.83,2220
  Bottom Layer w10: v1(58,790) 59.42,788.58 135.42,788.58 v1(136,788) ; v1(125.62,2338.01) 478,2338.01 580,2440 1725.46,2440 1731.32,2434.14 v1(1731.32,2223.41) ; v1(1025,2130) v1(1240,2130)
SCL: R40.1 SCL.1 U13.36 U15.6 | length 2426
  Top Layer w10: SCL.1 U15.6 ; 580,1005.86 580,1114.14 585.86,1120 R40.1 660,1120 670,1130 670,1357.33 917.82,1605.15 917.82,1647.92 1165.63,1895.73 1165.63,1945.79 1165.91,1946.07 1165.91,2360.91 1325,2520 U13.36@1780.83,2520
SDA: R43.2 SDA.1 U13.33 U15.5 | length 2203.6
  Top Layer w10: U15.5 720,1050 740,1070 R43.2 ; SDA.1@809,1121 741,1121 R43.2 ; U13.33@1780.83,2370 1719.09,2370 1523.65,2174.57 1280.37,2174.57 1279.93,2175 1196.35,2175 1186,2164.65 1186,1887.82 940.19,1642.01 940.19,1599.24 694.39,1353.43 694.39,1135.61 710,1120 R43.2
SWCLK: 
SWDIO: 
U0RX: J21.3 R33.2 U13.34 | length 2558.2
  Top Layer w10: R33.2@801,698 809,690 v1(809,671) ; v1(1306,2202) 1502.15,2202 1720.15,2420 1780.83,2420 1785.17,2415.66 1829.34,2415.66 J21.3
  Bottom Layer w10: v1(809,671) 926,671 960,705 960,831.01 1147.87,1018.88 1147.87,1652.87 1306,1811 v1(1306,2202)
U0TX: J21.2 U13.35 U14.25 | length 2566.3
  Top Layer w10: v1(902,732) 909,725 U14.25@947.85,725 ; v1(1276,2205) 1276,2436 1310,2470 1780.83,2470 1880.31,2470 1905,2445.31 J21.2
  Bottom Layer w10: v1(902,732) 902,827 1085.93,1010.93 1085.93,1630.93 1276,1821 v1(1276,2205)
VBATT: C27.2 J20.1 Q4.2 R30.2 U11.5 | length 285.9
  Top Layer w10: R30.2 1204.53,1122.7 1204.53,1132.29 1208.56,1136.32 v1(1208.56,1137.87) ; Q4.2 Q4.2@1406,806 ; v1(1472.13,1171.44) 1550.42,1171.44 J20.1@1551.5,1172.52
  Top Layer w20: v1(1108.8,1136.88) 1117.17,1128.52 1117.17,1115.23 C27.2 1125.87,1107.51 1145.03,1126.67 1145.03,1167.33 1132.36,1180 U11.5@1124,1180 ; v1(1370,806) Q4.2@1406,806
VBUS: 
VBUSS: C26.2 C32.2 C33.2 D13.1 D14.1 D15.1 D16.1 J18.A4_B9 J18.B4_A9 J19.1 Q4.1 R29.2 U11.4 U11.8 U14.7 U14.8 | length 747
  Top Layer w10: U11.4@877,1178 878,1177 v1(878,1158) ; U11.8 1103.27,1394.21 C26.2 ; C26.2@1111,1403 v1(1111,1430) ; v1(1355,1224) D13.1@1379,1224 ; v1(1355,1291) 1377,1291 D14.1@1378,1290 ; J18.A4_B9 J18.A4_B9@1491.06,333.31 ; 1491,361 1491.06,361.06 ; v1@1491,385 v1@1491.06,384.94 ; v1@1491.06,384.01 v1(1491.61,384.56) ; 1679,357 1679.74,357.74 ; v1@1679.74,384.62 v1(1680,384.87) ; v1(1716.77,525) D16.1
  Top Layer w11: U14.7@1099.88,634.45 1124.45,634.45 1131.38,641.38 1131.38,665.94 1198.11,665.94 1200,664.06 C33.2@1200.47,664.53
  Top Layer w20: C33.2@1200.47,664.53 C32.2@1260.83,664.53 ; v1(1264.04,643.69) C32.2 ; Q4.1@1398.23,728.5 1403.74,722.99 1403.74,696.66 1441.36,659.04 1481.01,659.04 D15.1 1476,647.94 R29.2 1476.92,592.92 v1(1505.69,592.92) ; J18.A4_B9@1491.06,333.31 v1@1491.06,384.94 ; 1491.06,361.06 v1@1491.06,384.01 ; 1679.74,357.74 v1@1679.74,384.62
VDD3V: 
VDD5V: 
VIN: 
VLVL: R30.1 R32.1 U13.7 | length 1718.2
  Top Layer w10: v1(1062,2320) U13.7@1111.54,2320 ; v1(1177,1022) 1177.13,1022.13 1177.13,1036.24 1184.88,1044 R30.1@1188,1044 ; R30.1 R32.1
  Bottom Layer w10: v1(1062,2320) 1063,2321 1224,2321 1338,2207 1338,1803 1177,1642 v1(1177,1022)
WDIR: 
WSPEED: 
pads on no net: J15.9 J15.10 J17.1 J17.3 J17.4 J17.6 J17.7 J17.8 J17.9 J17.11 J17.14 J17.15 J17.16 J17.18 J17.22 J17.25 J18.A8 J18.B8 J19. J19.3 J20.3 J20.4 U12.11 U12.12 U12.13 U12.14 U12.15 U13.4 U13.5 U13.6 U13.8 U13.10 U13.11 U13.12 U13.13 U13.14 U13.16 U13.17 U13.18 U13.19 U13.20 U13.21 U13.22 U13.32 U13.39_1 U13.39_2 U13.39_3 U13.39_4 U13.39_5 U13.39_6 U13.39_7 U13.39_8 U13.39_9 U13.39_10 U13.39_11 U13.39_12 U13.39_13 U13.39_14 U13.39_15 U13.39_16 U13.39_17 U13.39_18 U13.39_19 U13.39_20 U13.39_21 U14.1 U14.2 U14.9 U14.10 U14.11 U14.12 U14.13 U14.14 U14.15 U14.16 U14.17 U14.18 U14.19 U14.20 U14.21 U14.22 U14.23 U14.27 U15.1 U16.7 U16.11 U16.12 U16.15 U16.16

## Polygon pours and split planes (outlines as drawn)
+3V3 on VCC "+3V3_L03_P009" (solid, pour order 9): 5.83,2670 1895.83,2670 1975,2590.83 1975,2155 1980,2150 1857.5,2027.5 1857.5,70 5.83,70
VBUSS on VCC "VCC-VBUSS" (solid, pour order 6): 1470,330 1725,330 1725,465 1775,465 1780,470 1775.83,474.17 1775.83,554.53 1759.85,570.5 1531,570.5 1521.14,580.36 1521.14,681.34 1517.48,685 1410,685 1405,690 1405,735 1331.3,735 1289.88,693.58 1270,693.58 1270,975 960,975 950,985 950,1159.86 1408.39,1155 1405.91,1317.05 1408.39,1319.53 1350,1319.53 1350,1630 1325,1655 1095,1655 1045,1605 1045,1195 860,1195 860,1095 915,1095 925,1085 925,885 1180,885 1185,880 1185,693.58 1170.47,693.58 1151.89,675 1110,675 1090,655 1090,610 1095.94,604.06 1161.89,604.06 1161.89,573.11 1170,565 1455,565 1465,555 1465,550 1470,545
VBATT on VCC "VBATT_L03_P008" (solid, pour order 8): 1545,1150 1544.61,1149.61 1460,1149.61 1405,1094.61 1405,765 1350,765 1350,1077 1327,1077 1101.87,1077 1095.89,1082.98 1095.89,1144.76 1095,1145.65 1095,1200 1545,1200
no net on Bottom Layer "NONET_L04_P014" (solid, pour order 14): 5.83,2670 1895.83,2670 1975,2590.83 1975,2155 1857.5,2037.5 1857.5,70 5.83,70
GND on GND "GND_L02_P010" (solid, pour order 10): 5.83,2670 1895.83,2670 1975,2590.83 1975,2155 1857.5,2037.5 1857.5,70 5.83,70
no net on Top Layer "NONET_L01_P012" (solid, pour order 12): 5.83,2670 1895.83,2670 1975,2590.83 1975,2155 1857.5,2037.5 1857.5,70 5.83,70

## Keep-outs
Keep-Out Layer:
  lines w10: 1821.22,2670 5.83,2670 5.83,1913.43 5.83,70 1857.5,70 1857.5,2027.5 1975,2145 1975,2590.83 1895.83,2670

## Silkscreen, mask and mechanical layers (free items; w line width, h text height)
Top Overlay:
  text "EP_R" at 260,1822 h30
  text "GND" at 257,1765 h30
  text "BUSY" at 255,1590 h30
  text "GND" at 255,1485 h30
  text "MOSI" at 387,1485 h30
  text "DC" at 255,1385 h30
  text "EP_C" at 255,1290 h30
  text "SCK" at 387,1290 h30
  text "GND" at 387,1185 h30
  text "BUSY" at 150,825 h30
  text "EP_RESET" at 150,725 h30
  text "DC" at 155,615 h30
  text "EP_CS" at 155,525 h30
  text "SCK" at 155,420 h30
  text "MOSI" at 160,315 h30
  text "GND" at 165,220 h30
  text "3.3V" at 170,120 h30
Bottom Overlay:
  text "3.3V" at 1825,2530 h30
  text "U0TX" at 1825,2425 h30
  text "U0RX" at 1825,2330 h30
  text "GND" at 1825,2230 h30

## Text inside footprints (layer, text, board x,y; h text height)
U13: Mechanical 13 "ANTENNA" at 1209.39,2767.52 h70